# Altium PCB Copy of PCB1.PcbDoc
Units mm, origin at the board's own origin, x right, y up, seen from the top; angles counter-clockwise.
Board outline 55.12 x 55.63 mm, 2 copper layers (Top Layer, Bottom Layer); 20 components, 20 nets, 86 pads, 0 vias.
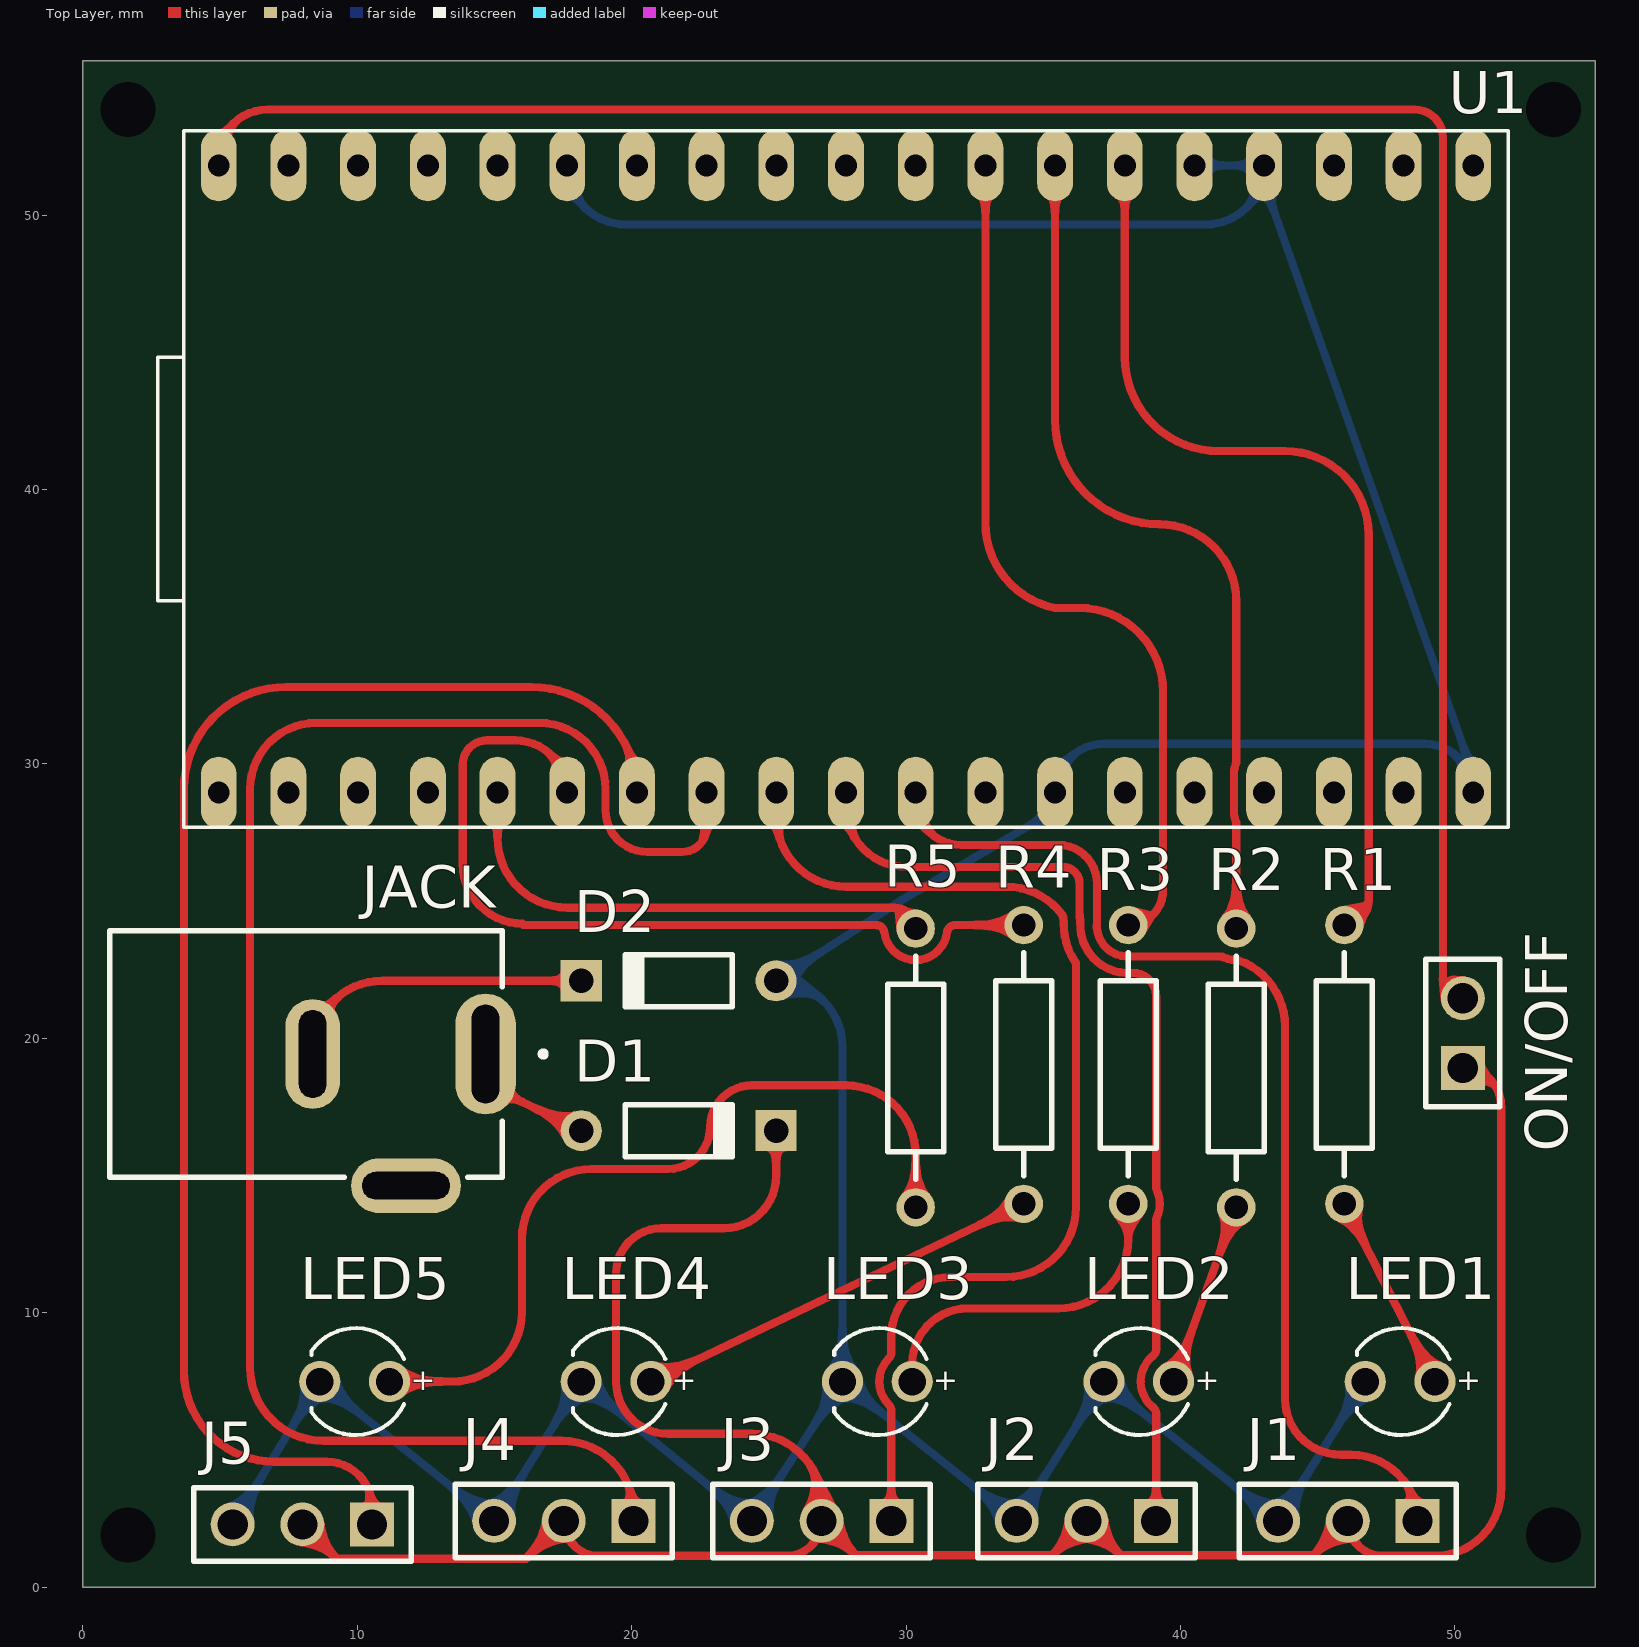
[diagram p0: Top Layer view]
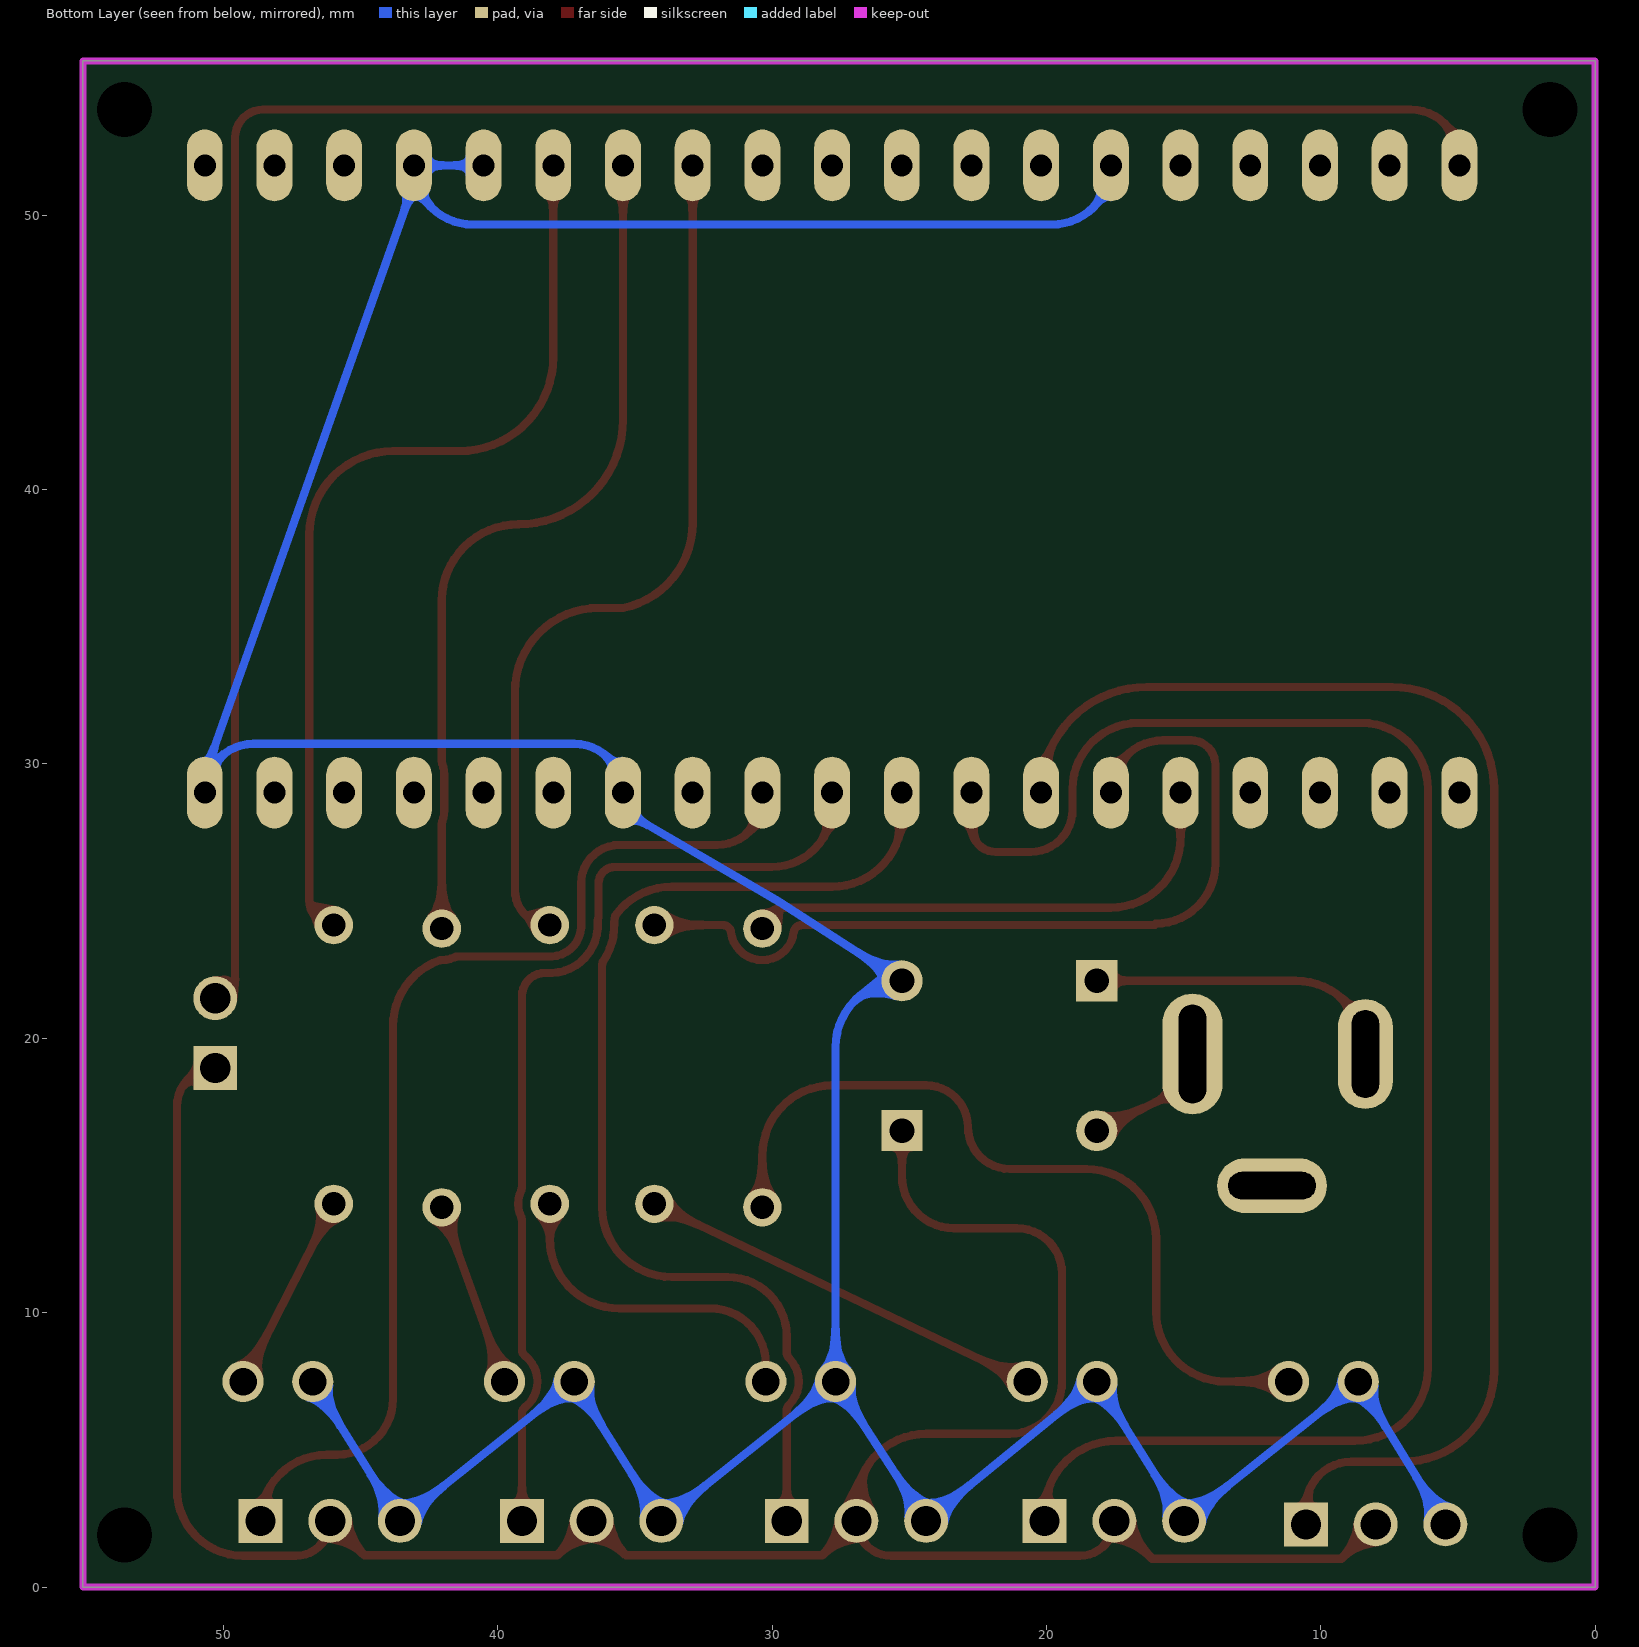
[diagram p1: Bottom Layer view, seen from below]

## Layer stack, top to bottom
Top Solder: solder mask 0.0102, Solder Resist, Dk 3.5
Top Layer: signal copper 0.0356
Dielectric 1: dielectric 0.32, FR-4, Dk 4.8
Bottom Layer: signal copper 0.0356
Bottom Solder: solder mask 0.0102, Solder Resist, Dk 3.5

## Board outline
0,0 55.118,0 55.118,55.626 0,55.626

## Design rules (kind name [scope] priority, off if disabled: settings)
Clearance [All] p1: gap=0.3 ignorepadtopadclearanceinfootprint=FALSE
HoleSize [All] p1: absolutevalues=TRUE maxlimit=10 minlimit=0.4 maxpercent=80.000 minpercent=20.000
PolygonConnect [All] p1: connectstyle=Relief reliefconductorwidth=0.254 reliefentries=4 polygonreliefangle="90 Angle" airgapwidth=0.254
RoomDefinition "Copy of SCH Placa presentation" [InComponentClass('Copy of SCH Placa presentation')] p1: confinementstyle=ConfineIn formatcopy=TRUE lockcomponents=FALSE outline -0.127,-0.127 55.245,-0.127 55.245,55.753 -0.127,55.753
RoutingVias [All] p1: holewidth=0.4 width=1.2 viastyle="Through Hole" minholewidth=0.4 minwidth=1.2 maxholewidth=10 maxwidth=10
SilkToSilkClearance [All] p1: silktosilkclearance=0.3
SolderMaskExpansion [All] p1: expansion=0.102 istentingtop=FALSE
Width [All] p1: maxlimit=10 minlimit=0.3 preferedwidth=0.3
28 further rules are at their usual default settings.

## Components (designator, comment, footprint, x,y, rotation, side; value= is the part's Value field where it differs from the comment)
D1 "Diode 1N4148" DO-35 21.717,16.637 r0 top
D2 "Diode 1N4148" DO-35 21.717,22.098 r180 top
J1 "61300311121" 61300311121 46.101,2.413 r180 top
J2 "61300311121" 61300311121 36.576,2.413 r180 top
J3 "61300311121" 61300311121 26.924,2.413 r180 top
J4 "61300311121" 61300311121 17.526,2.413 r180 top
J5 "61300311121" 61300311121 8.001,2.286 r180 top
JACK "DCJ200-10-A-XX-K_REVA" GCT_DCJ200-10-A-XX-K_REVA 8.128,19.431 r270 top
LED1 "Blue, 3.2V, 40deg" "LED RED 3MM" 48.006,7.493 r180 top
LED2 "Blue, 3.2V, 40deg" "LED RED 3MM" 38.481,7.493 r180 top
LED3 "Blue, 3.2V, 40deg" "LED RED 3MM" 28.956,7.493 r180 top
LED4 "Blue, 3.2V, 40deg" "LED RED 3MM" 19.431,7.493 r180 top
LED5 "Blue, 3.2V, 40deg" "LED RED 3MM" 9.906,7.493 r180 top
ON/OFF "61300211121" 61300211121 50.292,20.193 r90 top
R1 "Res" "RES AXIAL-0.4" 45.974,19.05 r270 top value=1K
R2 "Res" "RES AXIAL-0.4" 42.037,18.923 r270 top value=1K
R3 "Res" "RES AXIAL-0.4" 38.1,19.05 r270 top value=1K
R4 "Res" "RES AXIAL-0.4" 34.29,19.05 r270 top value=1K
R5 "Res" "RES AXIAL-0.4" 30.353,18.923 r270 top value=1K
U1 "NODE MCU 32S" BOARD 27.813,40.386 r270 top

## Footprints (in the part's own frame and the unit in brackets; to place one, negate y for a bottom-side part, rotate by r counter-clockwise, add the part's x,y. Pads: shape width x height; smd on the part's side, far side on the other; paste and mask are expansions set on the pad)
61300211121 [mm] "Pin Header, pitch 2.54 mm, THT, Vertical, single row, 2p"
  rect 1.6x1.6 hole 1.1: 1(-1.27,0)
  round 1.6 hole 1.1: 2(1.27,0)
  silkscreen extent -2.69,-1.35 2.69,1.35, body extent -2.54,-1.27 2.54,1.27, height 8.57
61300311121 [mm] "Pin Header, pitch 2.54 mm, THT, Vertical, single row, 3p"
  rect 1.6x1.6 hole 1.1: 1(-2.54,0)
  round 1.6 hole 1.1: 2(0,0) 3(2.54,0)
  silkscreen extent -3.96,-1.34 3.96,1.34, body extent -3.81,-1.27 3.81,1.27, height 8.57
BOARD [mm]
  oval 2.616x1.308 hole 0.8: 1(-11.43,22.86) 2(-11.43,20.32) 3(-11.43,17.78) 4(-11.43,15.24) 5(-11.43,12.7) 6(-11.43,10.16) 7(-11.43,7.62) 8(-11.43,5.08) 9(-11.43,2.54) 10(-11.43,0) 11(-11.43,-2.54) 12(-11.43,-5.08) 13(-11.43,-7.62) 14(-11.43,-10.16) 15(-11.43,-12.7) 16(-11.43,-15.24) 17(-11.43,-17.78) 18(-11.43,-20.32) 19(-11.43,-22.86) 20(11.43,22.86) 21(11.43,20.32) 22(11.43,17.78) 23(11.43,15.24) 24(11.43,12.7) 25(11.43,10.16) 26(11.43,7.62) 27(11.43,5.08) 28(11.43,2.54) 29(11.43,0) 30(11.43,-2.54) 31(11.43,-5.08) 32(11.43,-7.62) 33(11.43,-10.16) 34(11.43,-12.7) 35(11.43,-15.24) 36(11.43,-17.78) 37(11.43,-20.32) 38(11.43,-22.86)
  silkscreen extent -12.7,-25.08 12.7,24.13, body extent -12.78,-24.77 12.77,24.14, height 9.71
DO-35 [mm] "Diode, Axial; Body 3.8 x 1.9 mm (LxDia. max), Lead Dia. 0.53 mm (max)"
  round 1.5 hole 0.9: 1(-3.55,0)
  rect 1.5x1.5 hole 0.9: 2(3.55,0)
  silkscreen extent -1.95,-0.95 2.05,0.95, body extent -4.06,-1.27 4.06,1.22, height 3.23
GCT_DCJ200-10-A-XX-K_REVA [mm]
  oval 4.4x2.2 hole 1 slot 3.6 at 0 deg: 1(0,6.55)
  oval 4x2 hole 1 slot 3.2 at 0 deg: 2(0,0.25)
  oval 2x4 hole 1 slot 3.2 at 90 deg: 3(4.8,3.65)
  silkscreen extent -4.5,-7.15 4.5,8.75, body extent -4.5,-7.15 5.05,7.15, height 11
"LED RED 3MM" [mm] "THT Mono-color Round Color LED, 2-leads"
  round 1.5 hole 1: 1(1.27,0) 2(-1.27,0)
  silkscreen extent -1.8,-1.95 1.57,1.95, body extent -1.92,-1.92 1.52,1.92, height 5.38
"RES AXIAL-0.4" [mm] "Axial Device, Thru-Hole; 2 Leads; 0.4 in Pin Spacing"
  round 1.4 hole 0.85: 1(-5.08,0) 2(5.08,0)
  silkscreen extent -4.06,-1.02 4.06,1.02, body extent -5.47,-1.14 5.47,1.4, height 2.72

## Part data
D1 D2: "High Conductance Fast Diode", Code_JEDEC=DO-204-AH, ComponentLink1Description="Manufacturer Link", ComponentLink1URL=http://www.fairchildsemi.com/, ComponentLink2Description=Datasheet, ComponentLink2URL=http://www.fairchildsemi.com/ds/1N%2F1N4148.pdf, DatasheetVersion=1997, LatestRevisionDate=17-Jul-2002, LatestRevisionNote="Re-released for DXP Platform.", PackageDescription="Diode, Axial; Body 3.8 x 1.9 mm (LxDia. max), Lead Dia. 0.53 mm (max)", PackageReference=DO-35, Published=8-Jun-2000, Publisher="Altium Limited"
J1 J2 J3 J4 J5: "WR-PHD Pin Header, THT, pitch 2.54mm, Single Row, Vertical, 3pin", Contact Resistance=20mOhm, Operating Temperature="-40 to +105degC", Rated Current=3A, Withstanding Voltage=500VAC, Working Voltage=250VAC, ComponentLink1Description=Manufacturer, ComponentLink1URL=http://www.we-online.de, ComponentLink2Description=Datasheet, ComponentLink2URL=https://katalog.we-online.de/em/datasheet/6130xx11121.pdf, Gender=Male, Mounting Technology=THT, Orientation=Vertical, Packaging=Bag, Part Number=61300311121, Pin Number=3, Pitch=2.54mm, Published Date="June 2019", Publisher="Wurth Elektronik", Row Number=Single
JACK: "Power Barrel Connector Jack 2.05mm ID (0.081), 5.50mm OD (0.217) Through Hole, Right Angle", Package=None, Check_prices=https://www.snapeda.com/parts/DCJ200-10-A-K1-K/Global+Connector+Technology/view-part/?ref=eda, MF="Global Connector Technology", MP=DCJ200-10-A-K1-K, SnapEDA_Link=https://www.snapeda.com/parts/DCJ200-10-A-K1-K/Global+Connector+Technology/view-part/?ref=snap
LED1 LED2 LED3 LED4 LED5: library part LED, "LED WL-TMRC THT Mono-color Round", Emitting Color=Blue, Forward Voltage=3.2V, Operating Temperature="-40 to +85degC", Part Number=151051BS04000, Chip Technology=GaN, ComponentLink1Description=Manufacturer, ComponentLink1URL=http://www.we-online.de, ComponentLink2Description=Datasheet, ComponentLink2URL=https://katalog.we-online.de/led/datasheet/151051BS04000.pdf, Dominant Wavelength=470nm, Luminous Intensity=500mcd, Mounting Technology=THT, Packaging=Bulk, Peak Wavelength=465nm, Published Date="October 2019", Publisher="Wurth Elektronik", Size=5mm, Viewing Angle=40deg
ON/OFF: "WR-PHD Pin Header, THT, pitch 2.54mm, Single Row, Vertical, 2pin", Contact Resistance=20mOhm, Operating Temperature="-40 to +105degC", Rated Current=3A, Withstanding Voltage=500VAC, Working Voltage=250VAC, ComponentLink1Description=Manufacturer, ComponentLink1URL=http://www.we-online.de, ComponentLink2Description=Datasheet, ComponentLink2URL=https://katalog.we-online.de/em/datasheet/6130xx11121.pdf, Gender=Male, Mounting Technology=THT, Orientation=Vertical, Packaging=Bag, Part Number=61300211121, Pin Number=2, Pitch=2.54mm, Published Date="June 2019", Publisher="Wurth Elektronik", Row Number=Single
R1 R2 R3 R4 R5: "Resistor", LatestRevisionDate=17-Jul-2002, LatestRevisionNote="Re-released for DXP Platform.", PackageDescription="Axial Device, Thru-Hole; 2 Leads; 0.4 in Pin Spacing", PackageReference=AXIAL-0.4, Published=8-Jun-2000, Publisher="Altium Limited"
U1: Package=None, Availability=Warning, Check_prices=https://www.snapeda.com/parts/ESP32-DEVKITC-32D/Espressif%20Systems/view-part/2777395/?ref=eda, MF="Espressif Systems", MP=ESP32-DEVKITC-32D, Price=None, Purchase-URL=https://pricing.snapeda.com/search/part/ESP32-DEVKITC-32D/?ref=eda, SnapEDA_Link=https://www.snapeda.com/parts/ESP32-DEVKITC-32D/Espressif%20Systems/view-part/2777395/?ref=snap

## Free pads (board coordinates)
  round 0 hole 2 unplated: 9(1.651,1.905) 9(1.651,53.848) 9(53.594,1.905) 9(53.594,53.848)

## Nets (pads, with @x,y where several pads share a name; then routed paths per layer and width w, separated by ;. In a path a pad name is that pad's centre, name@x,y a point inside that pad or via, vN(x,y) a via of type N, cw(c..) or ccw(c..) an arc to the next point about the centre after c; other vN are vias at no path point)
GND: D2.1 J1.3 J2.3 J3.3 J4.3 J5.3 LED1.1 LED2.1 LED3.1 LED4.1 LED5.1 U1.4 U1.5 U1.14 U1.20 U1.26 | length 163
  Bottom Layer w0.3: J5.3 LED5.1 J4.3 LED4.1 J3.3 LED3.1 ; U1.14 ccw(c19.812,51.816) 19.812,49.657 40.894,49.657 ccw(c40.894,51.816) U1.4 ; U1.5 U1.4 ; LED1.1 J1.3 LED2.1 J2.3 LED3.1 ; LED3.1 27.686,19.679 ccw(c25.267,19.679) D2.1 29.731,24.97 cw(c30.353,24.003) 29.773,24.996 35.433,28.302 U1.26 cw(c37.211,28.956) 37.211,30.734 48.895,30.734 cw(c48.895,28.956) U1.20 50.673,29.61 43.053,51.162 U1.4
NetD1_1: D1.1 JACK.1 | length 5
  Top Layer w0.3: JACK.1 14.678,18.331 D1.1
NetD1_2: D1.2 J1.2 J2.2 J3.2 J4.2 J5.2 ON/OFF.1 | length 90.7
  Top Layer w0.3: J5.2 9.251,1.036 16.149,1.036 J4.2 ccw(c18.796,2.413) 18.796,1.143 25.654,1.143 ccw(c25.654,2.413) J3.2 ; D1.2 25.267,14.98 cw(c23.368,14.98) 23.368,13.081 21.082,13.081 ccw(c21.082,11.43) 19.431,11.43 19.431,7.493 ccw(c21.336,7.493) 21.336,5.588 24.384,5.588 cw(c24.384,3.048) 26.924,3.048 J3.2 ; ON/OFF.1 cw(c50.292,17.526) 51.689,17.526 51.689,3.556 cw(c49.276,3.556) 49.276,1.143 47.371,1.143 cw(c47.371,2.413) J1.2 44.851,1.163 37.826,1.163 J2.2 35.326,1.163 28.174,1.163 J3.2
NetD2_2: D2.2 JACK.2 | length 12.4
  Top Layer w0.3: JACK.2 8.378,19.558 cw(c10.918,19.558) 10.918,22.098 D2.2
  Bottom Layer w0.3: JACK.2@8.378,18.431 JACK.2
NetJ1_1: J1.1 U1.28 | length 40
  Top Layer w0.3: U1.28@30.372,28.953 ccw(c32.004,28.702) 32.004,27.051 35.56,27.051 cw(c35.56,25.654) 36.957,25.654 36.957,24.271 cw(c36.657,24.272) 36.956,24.244 ccw(c38.1,24.13) 38.199,22.984 ccw(c38.1,24.13) 38.211,22.985 cw(c38.242,22.687) 38.241,22.987 ; 38.242,22.987 41.275,22.987 cw(c41.275,20.447) 41.465,22.98 cw(c41.442,22.681) 41.565,22.954 ccw(c42.037,24.003) 42.037,22.853 cw(c42.038,22.553) 42.139,22.835 cw(c41.275,20.447) 43.815,20.447 43.815,6.858 ccw(c45.847,6.858) 45.847,4.826 46.228,4.826 cw(c46.228,2.413) J1.1
NetJ2_1: J2.1 U1.29 | length 35.9
  Top Layer w0.3: U1.29 27.813,28.448 ccw(c30.015,28.448) 30.015,26.246 33.324,26.246 35.73,26.246 cw(c35.73,25.654) 36.322,25.654 36.322,24.63 ccw(c38.533,24.63) 36.349,24.283 cw(c36.053,24.237) 36.352,24.223 ccw(c38.1,24.13) 38.246,22.386 cw(c38.269,22.087) 38.268,22.387 cw(c38.268,21.539) 39.116,21.539 39.116,14.578 ccw(c39.416,14.579) 39.143,14.454 cw(c38.1,13.97) 39.143,13.486 ccw(c39.416,13.361) 39.116,13.362 39.116,8.665 cw(c38.816,8.666) 39.004,8.432 ccw(c39.751,7.493) 39.003,6.554 cw(c38.816,6.32) 39.116,6.321 J2.1
NetJ3_1: J3.1 U1.30 | length 40.2
  Top Layer w0.3: U1.30 25.273,28.067 ccw(c27.813,28.067) 27.813,25.527 33.655,25.527 cw(c33.655,22.987) 35.674,24.529 cw(c35.435,24.347) 35.734,24.374 ccw(c38.533,24.63) 35.748,24.245 cw(c35.451,24.205) 35.751,24.198 ccw(c38.1,24.13) 36.145,22.826 cw(c35.895,22.66) 36.195,22.661 36.195,13.843 cw(c33.655,13.843) 33.655,11.303 31.623,11.303 ccw(c31.623,9.144) 29.464,9.144 29.464,8.551 cw(c29.164,8.552) 29.377,8.341 ccw(c30.226,7.493) 29.377,6.645 cw(c29.164,6.434) 29.464,6.435 J3.1
NetJ4_1: J4.1 U1.31 | length 61.2
  Top Layer w0.3: J4.1@20.046,2.416 ccw(c17.472,2.74) 17.472,5.334 8.763,5.334 cw(c8.763,8.001) 6.096,8.001 6.096,29.083 cw(c8.509,29.083) 8.509,31.496 16.637,31.496 cw(c16.637,29.083) 19.05,29.083 19.05,28.321 ccw(c20.574,28.321) 20.574,26.797 21.844,26.797 ccw(c21.844,27.686) 22.733,27.686 U1.31
NetJ5_1: J5.1 U1.32 | length 52.4
  Top Layer w0.3: J5.1 10.541,2.921 ccw(c8.89,2.921) 8.89,4.572 6.985,4.572 cw(c6.985,7.874) 3.683,7.874 3.683,29.083 cw(c7.406,29.083) 7.406,32.806 16.343,32.806 cw(c16.343,28.956) 20.147,29.548 20.193,29.548 U1.32
NetLED1_2: LED1.2 R1.2 | length 7.3
  Top Layer w0.3: R1.2 LED1.2
NetLED2_2: LED2.2 R2.2 | length 6.7
  Top Layer w0.3: LED2.2 R2.2
NetLED3_2: LED3.2 R3.2 | length 12.4
  Top Layer w0.3: LED3.2 30.226,8.128 cw(c32.258,8.128) 32.258,10.16 35.56,10.16 ccw(c35.56,12.7) 38.1,12.7 R3.2
NetLED4_2: LED4.2 R4.2 | length 15.1
  Top Layer w0.3: LED4.2 R4.2
NetLED5_2: LED5.2 R5.2 | length 29.8
  Top Layer w0.3: LED5.2 13.462,7.493 ccw(c13.462,10.033) 16.002,10.033 16.002,12.7 cw(c18.542,12.7) 18.542,15.24 21.336,15.24 ccw(c21.336,16.764) 22.86,16.764 cw(c24.384,16.764) 24.384,18.288 27.813,18.288 cw(c27.813,15.748) 30.353,15.748 R5.2
NetON/OFF_2: ON/OFF.2 U1.19 | length 78.2
  Top Layer w0.3: U1.19 4.953,52.07 cw(c6.731,52.07) 6.731,53.848 47.75,53.848 48.548,53.848 cw(c48.548,52.827) 49.569,52.827 49.569,22.186 ccw(c50.292,22.186) ON/OFF.2
NetR1_1: R1.1 U1.6 | length 34.3
  Top Layer w0.3: U1.6 37.973,44.831 ccw(c41.402,44.831) 41.402,41.402 43.815,41.402 cw(c43.815,38.354) 46.863,38.354 46.863,25.019 cw(c45.974,25.019) R1.1
NetR2_1: R2.1 U1.7 | length 31.6
  Top Layer w0.3: U1.7 35.433,42.545 ccw(c39.243,42.545) 39.243,38.735 cw(c39.243,35.941) 42.037,35.941 42.037,30.098 cw(c41.737,30.099) 42.019,29.996 ccw(c43.053,29.61) 41.949,29.61 41.949,28.302 ccw(c43.053,28.302) 42.019,27.916 cw(c41.737,27.813) 42.037,27.814 R2.1
NetR3_1: R3.1 U1.8 | length 32.3
  Top Layer w0.3: U1.8 32.893,38.787 ccw(c36.053,38.785) 35.433,35.687 36.322,35.687 cw(c36.322,32.639) 39.37,32.639 39.37,25.4 cw(c38.1,25.4) R3.1
NetR4_1: R4.1 U1.33 | length 32.1
  Top Layer w0.3: U1.33 ccw(c15.748,28.956) 15.748,30.861 14.732,30.861 ccw(c14.732,29.972) 13.843,29.972 13.843,26.366 ccw(c16.028,26.366) 16.028,24.181 ccw(c16.079,24.181) 16.079,24.13 28.915,24.13 cw(c28.913,23.83) 29.211,23.866 ccw(c30.353,24.003) 31.495,23.867 cw(c31.793,23.83) 31.791,24.13 R4.1
NetR5_1: R5.1 U1.34 | length 18.8
  Top Layer w0.3: U1.34 15.113,27.305 ccw(c17.653,27.305) 17.653,24.765 29.591,24.765 cw(c29.591,24.003) R5.1
pads on no net: JACK.3 U1.1 U1.2 U1.3 U1.9 U1.10 U1.11 U1.12 U1.13 U1.15 U1.16 U1.17 U1.18 U1.21 U1.22 U1.23 U1.24 U1.25 U1.27 U1.35 U1.36 U1.37 U1.38

## Keep-outs
Bottom Layer:
  the board outline again, w0.254

## Text inside footprints (layer, text, board x,y; h text height)
LED1: Top Overlay "+" at 50.956,7.843 h0.8 r180
LED2: Top Overlay "+" at 41.431,7.843 h0.8 r180
LED3: Top Overlay "+" at 31.906,7.843 h0.8 r180
LED4: Top Overlay "+" at 22.381,7.843 h0.8 r180
LED5: Top Overlay "+" at 12.856,7.843 h0.8 r180